# Altium PCB PCB.PcbDoc
Units mm, origin at the board's own origin, x right, y up, seen from the top; angles counter-clockwise.
Board outline 152.4 x 101.6 mm, 2 copper layers (Top Layer, Bottom Layer); 14 components, 19 nets, 91 pads, 21 vias.
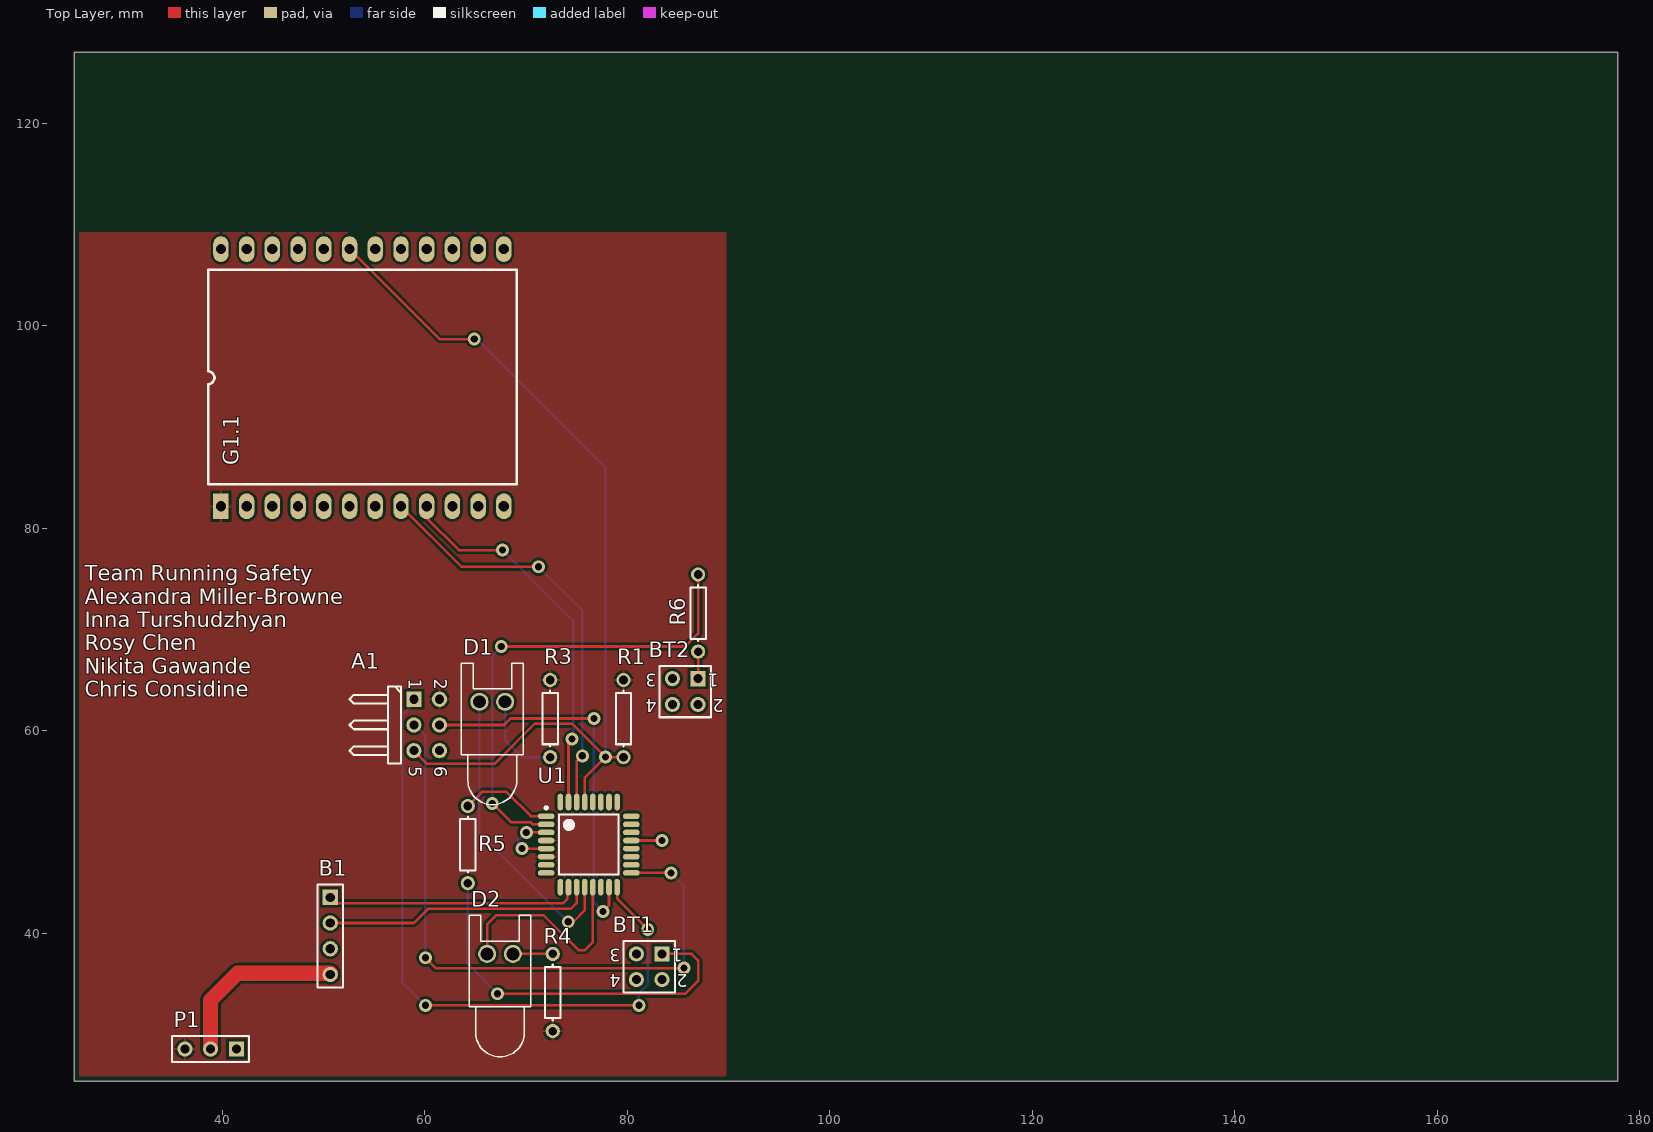
[diagram p0: Top Layer view]
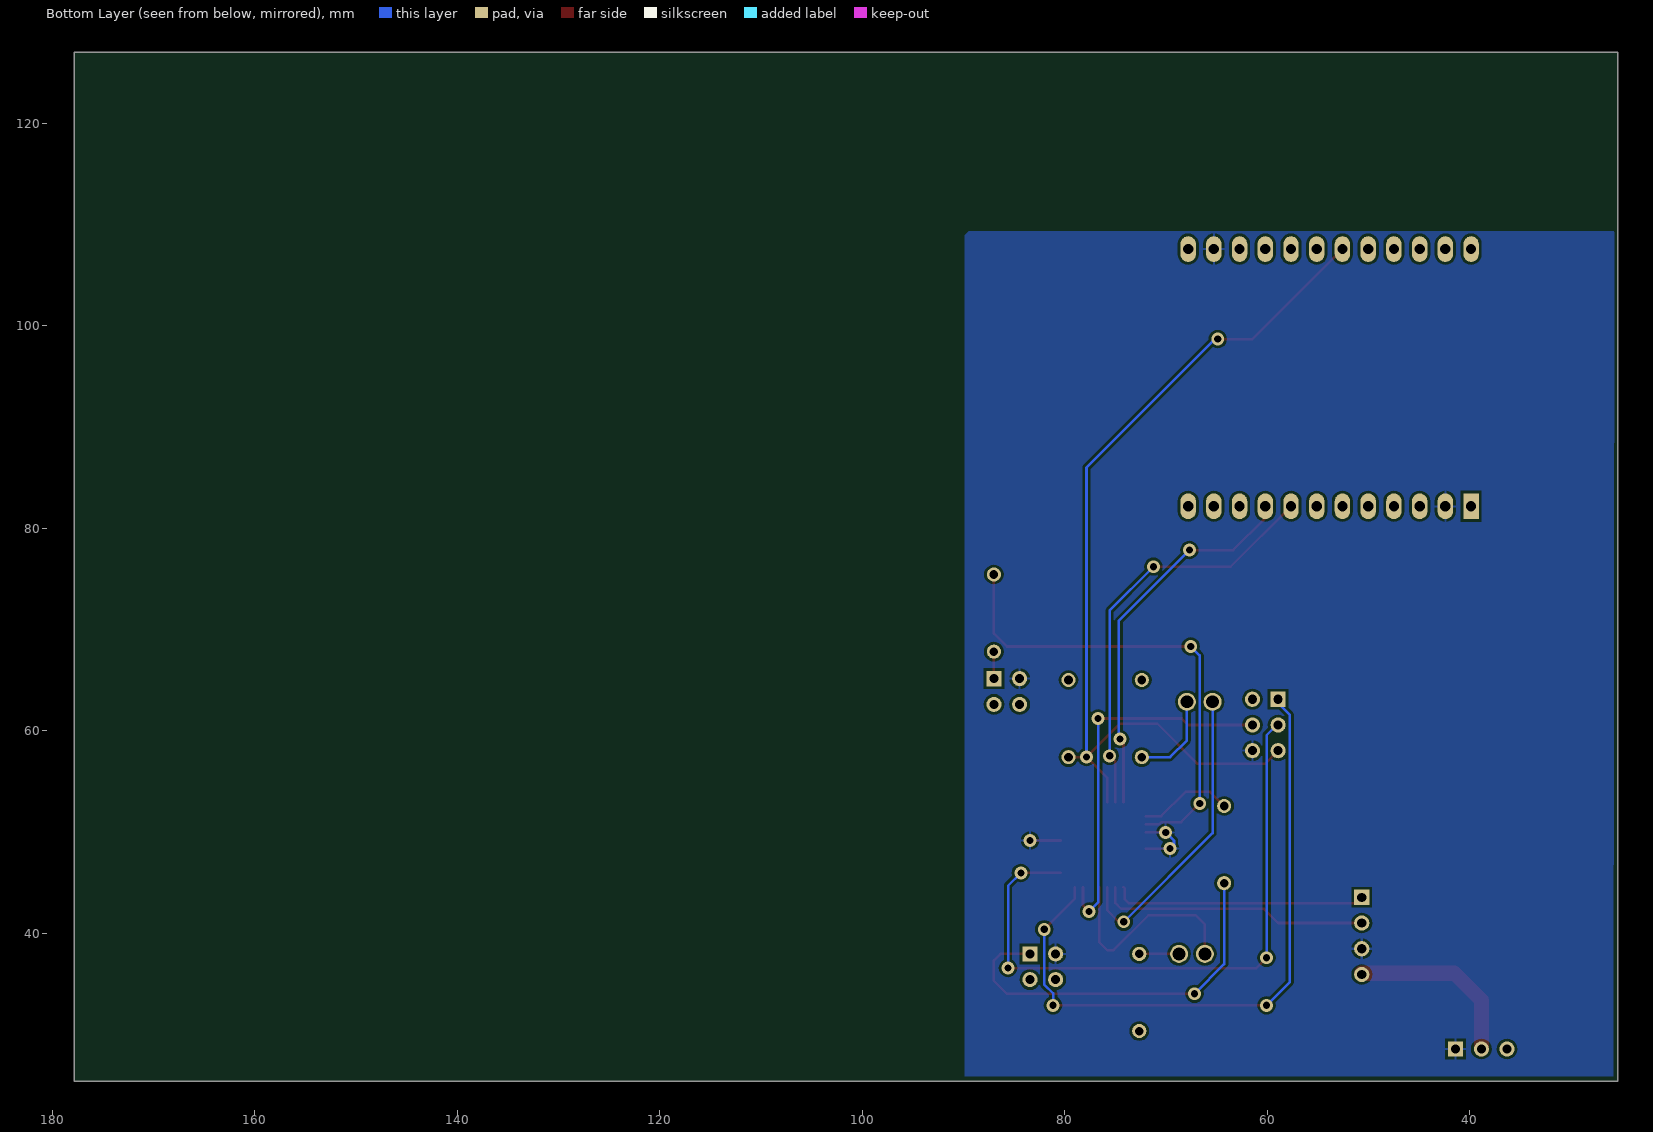
[diagram p1: Bottom Layer view, seen from below]

## Layer stack, top to bottom
Top Solder: solder mask 0.0102, Solder Resist, Dk 3.5
Top Layer: signal copper 0.0356
Dielectric 1: dielectric 0.32, FR-4, Dk 4.8
Bottom Layer: signal copper 0.0356
Bottom Solder: solder mask 0.0102, Solder Resist, Dk 3.5

## Board outline
25.4,25.4 177.8,25.4 177.8,127 25.4,127

## Design rules (kind name [scope] priority, off if disabled: settings)
Clearance [All] p1: gap=0.254
PolygonConnect [All] p1: connectstyle=Relief reliefconductorwidth=0.254 reliefentries=4 polygonreliefangle="90 Angle" airgapwidth=0.254
RoutingVias [All] p1: holewidth=0.711 width=1.27 viastyle="Through Hole" minholewidth=0.711 minwidth=1.27 maxholewidth=0.711 maxwidth=1.27
SolderMaskExpansion [All] p1: expansion=0.102
Width [All] p1: maxlimit=0.254 minlimit=0.254 preferedwidth=0.254
30 further rules are at their usual default settings.

## Components (designator, comment, footprint, x,y, rotation, side; value= is the part's Value field where it differs from the comment)
A1 "Arduino ISP" HDR2X3H 58.928,63.119 r270 top
B1 "Bluetooth" HDR1X4 50.673,43.561 r270 top
BT1 "Button1" HDR2X2 83.439,37.973 r180 top
BT2 "Button2" HDR2X2 86.995,65.151 r180 top
D1 "LED1" LED-0 66.675,62.865 r0 top
D2 "LED2" LED-0 67.437,37.973 r0 top
G1.1 "GSM_2.0" DIP24 39.878,82.169 r90 top
P1 "Battery" HDR1X3 41.402,28.575 r180 top
R1 "Res1" AXIAL-0.3 79.629,61.214 r90 top
R3 "Res3" AXIAL-0.3 72.39,61.214 r270 top
R4 "Res4" AXIAL-0.3 72.644,34.163 r90 top
R5 "Res5" AXIAL-0.3 64.262,48.768 r90 top
R6 "Res6" AXIAL-0.3 86.995,71.628 r90 top
U1 "ATmega328P-AU" 32A_N 76.2,48.768 r0 top

## Footprints (in the part's own frame and the unit in brackets; to place one, negate y for a bottom-side part, rotate by r counter-clockwise, add the part's x,y. Pads: shape width x height; smd on the part's side, far side on the other; paste and mask are expansions set on the pad)
32A_N [mm] "Thin QFP, 32-Leads, Body 7x7mm, Pitch 0.8mm, IPC Medium Density"
  oval 1.65x0.55 smd: 1(-4.2,2.8) 2(-4.2,2) 3(-4.2,1.2) 4(-4.2,0.4) 5(-4.2,-0.4) 6(-4.2,-1.2) 7(-4.2,-2) 8(-4.2,-2.8) 17(4.2,-2.8) 18(4.2,-2) 19(4.2,-1.2) 20(4.2,-0.4) 21(4.2,0.4) 22(4.2,1.2) 23(4.2,2) 24(4.2,2.8)
  oval 0.55x1.65 smd: 9(-2.8,-4.2) 10(-2,-4.2) 11(-1.2,-4.2) 12(-0.4,-4.2) 13(0.4,-4.2) 14(1.2,-4.2) 15(2,-4.2) 16(2.8,-4.2) 25(2.8,4.2) 26(2,4.2) 27(1.2,4.2) 28(0.4,4.2) 29(-0.4,4.2) 30(-1.2,4.2) 31(-2,4.2) 32(-2.8,4.2)
  silkscreen extent -4.32,-2.95 2.95,3.75, body extent -3.5,-3.5 3.5,3.5, height 1.2
AXIAL-0.3 [mm] "Axial Device, Thru-Hole; 2 Leads; 0.3 in Pin Spacing"
  round 1.4 hole 0.85: 1(-3.81,0) 2(3.81,0)
  silkscreen extent -2.77,-0.76 2.77,0.76
DIP24 [mil]
  rect 100x60 hole 40: 1(0,0)
  oval 100x60 hole 40: 2(1000,0) 3(0,-100) 4(1000,-100) 5(0,-200) 6(1000,-200) 7(0,-300) 8(1000,-300) 9(0,-400) 10(1000,-400) 11(0,-500) 12(1000,-500) 13(0,-600) 14(1000,-600) 15(0,-700) 16(1000,-700) 17(0,-800) 18(1000,-800) 19(0,-900) 20(1000,-900) 21(0,-1000) 22(1000,-1000) 23(0,-1100) 24(1000,-1100)
  silkscreen extent 85,-1150 920,50
HDR1X3 [mm] "Connector; Header; 3 Position"
  rect 1.5x1.5 hole 0.9: 1(0,0)
  round 1.5 hole 0.9: 2(2.54,0) 3(5.08,0)
  silkscreen extent -1.27,-1.27 6.35,1.27
HDR1X4 [mm] "Connector; Header; 4 Position"
  rect 1.5x1.5 hole 0.9: 1(0,0)
  round 1.5 hole 0.9: 2(2.54,0) 3(5.08,0) 4(7.62,0)
  silkscreen extent -1.27,-1.27 8.89,1.27
HDR2X2 [mm] "Connector; Header; 2x2 Position"
  rect 1.5x1.5 hole 0.9: 1(0,0)
  round 1.5 hole 0.9: 2(0,2.54) 3(2.54,0) 4(2.54,2.54)
  silkscreen extent -1.27,-1.27 3.81,3.81
HDR2X3H [mm] "Connector; Header; 3x2 Position; Right Angle"
  rect 1.5x1.5 hole 0.9: 1(0,0)
  round 1.5 hole 0.9: 2(0,2.54) 3(2.54,0) 4(2.54,2.54) 5(5.08,0) 6(5.08,2.54)
  silkscreen extent -1.27,-6.35 6.35,-1.27
LED-0 [mil] "LED; 2 Leads"
  round 70 hole 50: 1(50,0) 2(-50,0)
  silkscreen extent -120,-400 120,150

## Part data
A1: library part "Header 3X2H", "Header, 3-Pin, Dual row, Right Angle"
B1: library part "Header 4", "Header, 4-Pin"
BT1 BT2: library part "Header 2X2", "Header, 2-Pin, Dual row"
D1 D2: library part LED0, "Typical INFRARED GaAs LED"
G1.1: library part Component_1
P1: library part "Header 3", "Header, 3-Pin"
R1: "Resistor"
R3 R4 R5 R6: library part Res1, "Resistor"
U1: "8-bit AVR Microcontroller, 32KB Flash, 1KB EEPROM, 2KB SRAM, 32-pin TQFP, Industrial Grade (-40°C to 85°C)"

## Via types
v1: diameter 1.27, hole 0.711, Top Layer to Bottom Layer, 21 vias

## Nets (pads, with @x,y where several pads share a name; then routed paths per layer and width w, separated by ;. In a path a pad name is that pad's centre, name@x,y a point inside that pad or via, vN(x,y) a via of type N, cw(c..) or ccw(c..) an arc to the next point about the centre after c; other vN are vias at no path point)
3V3: B1.4 P1.2 | length 17.7
  Top Layer w1.5: P1.2 38.862,33.401 41.529,36.068 B1.4@50.673,36.068
5V: A1.2 G1.1.1 P1.3 R1.2 R3.1 R4.1 U1.4 U1.6
GND: A1.6 B1.3 BT1.3 BT2.3 G1.1.3 G1.1.22 P1.1 U1.3 U1.5 U1.21 | length 9.6
  Top Layer w0.254: v1(69.596,48.387) 69.615,48.368 U1.5 ; v1(70.034,49.968) U1.3 ; U1.21 v1(83.42,49.168)
  Bottom Layer w0.254: v1(69.596,48.387) 69.342,48.387 69.215,48.514 69.215,49.149 v1(70.034,49.968)
NetA1_1: A1.1 U1.16 | length 66
  Top Layer w0.254: v1(60.071,32.893) v1(81.153,32.893) ; U1.16 79,43.428 v1(82.03,40.398)
  Bottom Layer w0.254: A1.1 58.928,62.738 57.797,61.607 57.797,35.167 v1(60.071,32.893) ; v1(81.153,32.893) 81.153,34.088 82.03,34.965 v1(82.03,40.398)
NetA1_3: A1.3 U1.17 | length 63.3
  Top Layer w0.254: v1(60.071,37.592) 61.087,36.576 v1(85.598,36.576) ; U1.17 v1(84.334,45.968)
  Bottom Layer w0.254: A1.3 59.055,60.579 60.071,59.563 v1(60.071,37.592) ; v1(84.334,45.968) 85.598,44.704 v1(85.598,36.576)
NetA1_4: A1.4 U1.15 | length 37.6
  Top Layer w0.254: A1.4 67.818,60.579 68.453,61.214 v1(76.708,61.214) ; v1(77.597,42.164) 78.2,42.767 U1.15
  Bottom Layer w0.254: v1(76.708,61.214) 76.708,43.053 v1(77.597,42.164)
NetA1_5: A1.5 G1.1.12 R1.1 U1.29 | length 92.3
  Top Layer w0.254: G1.1.12 61.468,98.679 v1(64.897,98.679) ; A1.5 60.198,56.769 66.929,56.769 70.866,60.706 74.549,60.706 v1(77.851,57.404) ; U1.29 75.8,55.353 v1(77.851,57.404) ; R1.1 v1(77.851,57.404)
  Bottom Layer w0.254: v1(64.897,98.679) 65.151,98.679 77.851,85.979 v1(77.851,57.404)
NetB1_1: B1.1 U1.10 | length 25.1
  Top Layer w0.254: B1.1 51.268,42.966 73.66,42.966 74.056,43.362 74.056,44.424 U1.10
NetB1_2: B1.2 U1.11 | length 26.7
  Top Layer w0.254: B1.2 58.928,41.021 60.325,42.418 74.422,42.418 75,42.996 U1.11
NetBT1_1: BT1.1 R5.1 | length 38.3
  Top Layer w0.254: v1(67.183,34.036) 85.725,34.036 86.995,35.306 86.995,37.338 86.36,37.973 BT1.1
  Bottom Layer w0.254: R5.1 64.262,36.957 v1(67.183,34.036)
NetBT2_1: BT2.1 R6.1 | length 2.7
  Top Layer w0.254: BT2.1 R6.1
NetD1_1: D1.1 R3.2 | length 8.9
  Bottom Layer w0.254: D1.1 67.945,59.055 69.596,57.404 R3.2
NetD1_2: D1.2 U1.12 | length 29.7
  Top Layer w0.254: v1(74.168,41.148) 74.676,41.148 75.819,42.291 U1.12@75.819,44.549
  Bottom Layer w0.254: D1.2 65.405,49.911 v1(74.168,41.148)
NetD2_1: D2.1 R4.2 | length 3.9
  Top Layer w0.254: D2.1 R4.2
NetD2_2: D2.2 U1.13 | length 20.9
  Top Layer w0.254: D2.2 66.167,40.894 67.056,41.783 71.755,41.783 75.184,38.354 75.819,38.354 76.581,39.116 U1.13@76.581,44.549
NetG1.1_15: G1.1.15 U1.30 | length 41.5
  Top Layer w0.254: G1.1.15 63.627,76.2 v1(71.247,76.2) v1@71.12,76.073 ; U1.30 75,56.966 v1(75.565,57.531)
  Bottom Layer w0.254: v1(71.247,76.2) 75.565,71.882 v1(75.565,57.531)
NetG1.1_17: G1.1.17 U1.31 | length 37.9
  Top Layer w0.254: G1.1.17 60.198,81.026 63.373,77.851 v1(67.691,77.851) ; U1.31 74.2,58.833 v1(74.549,59.182)
  Bottom Layer w0.254: v1(67.691,77.851) 74.676,70.866 74.676,59.309 v1(74.549,59.182)
NetR5_2: R5.2 U1.1 | length 9.3
  Top Layer w0.254: R5.2 65.659,53.975 68.072,53.975 70.479,51.568 U1.1
NetR6_2: R6.2 U1.2 | length 47.5
  Top Layer w0.254: v1(66.675,52.832) 68.523,50.984 70.455,50.984 70.671,50.768 U1.2 ; v1(67.564,68.326) 85.725,68.326 86.995,69.596 R6.2@86.995,75.105
  Bottom Layer w0.254: v1(66.675,52.832) 66.675,67.437 v1(67.564,68.326)
pads on no net: BT1.2 BT1.4 BT2.2 BT2.4 G1.1.2 G1.1.4 G1.1.5 G1.1.6 G1.1.7 G1.1.8 G1.1.9 G1.1.10 G1.1.11 G1.1.13 G1.1.14 G1.1.16 G1.1.18 G1.1.19 G1.1.20 G1.1.21 G1.1.23 G1.1.24 U1.7 U1.8 U1.9 U1.14 U1.18 U1.19 U1.20 U1.22 U1.23 U1.24 U1.25 U1.26 U1.27 U1.28 U1.32

## Polygon pours and split planes (outlines as drawn)
GND on Bottom Layer "Bottom Layer-No Net" (solid, pour order 6): 25.717,109.328 89.471,109.328 89.598,109.201 89.852,108.947 89.852,25.889 25.844,25.889
5V on Top Layer "Bottom Layer-No Net" (solid, remove dead copper, pour order 8): 25.896,109.208 89.777,109.208 89.777,25.769 89.65,25.896 25.896,25.896

## Silkscreen, mask and mechanical layers (free items; w line width, h text height)
Top Overlay:
  text "Team Running Safety / Alexandra Miller-Browne / Inna Turshudzhyan / Rosy Chen / Nikita Gawande / Chris Considine" at 26.416,63.373 h1.52
Mechanical 1:
  lines w0.254: 25.527,25.781 25.527,66.929 25.527,109.474 89.916,109.474 89.916,25.4 ; 25.654,25.654 90.17,25.654

## Text inside footprints (layer, text, board x,y; h text height)
A1: Top Overlay "6" at 60.96,56.515 h1.27 r270; Top Overlay "5" at 58.42,56.515 h1.27 r270; Top Overlay "1" at 58.42,65.151 h1.27 r270; Top Overlay "2" at 60.96,65.151 h1.27 r270
BT1: Top Overlay "3" at 79.375,38.481 h1.27 r180; Top Overlay "4" at 79.375,35.941 h1.27 r180; Top Overlay "2" at 85.979,35.941 h1.27 r180; Top Overlay "1" at 85.471,38.481 h1.27 r180
BT2: Top Overlay "3" at 82.931,65.659 h1.27 r180; Top Overlay "4" at 82.931,63.119 h1.27 r180; Top Overlay "2" at 89.535,63.119 h1.27 r180; Top Overlay "1" at 89.027,65.659 h1.27 r180